# Altium PCB ruler.PcbDoc (part 1 of 2)
Units mm, origin at the board's own origin, x right, y up, seen from the top; angles counter-clockwise.
Board outline 304.8 x 31.75 mm, 2 copper layers (Top Layer, Bottom Layer); 31 components, 41 nets, 152 pads, 99 vias.
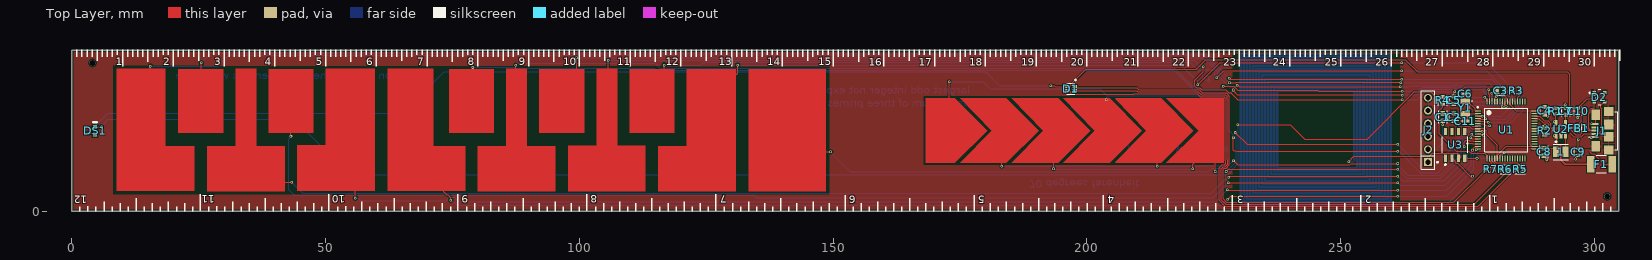
[diagram p0: Top Layer view]
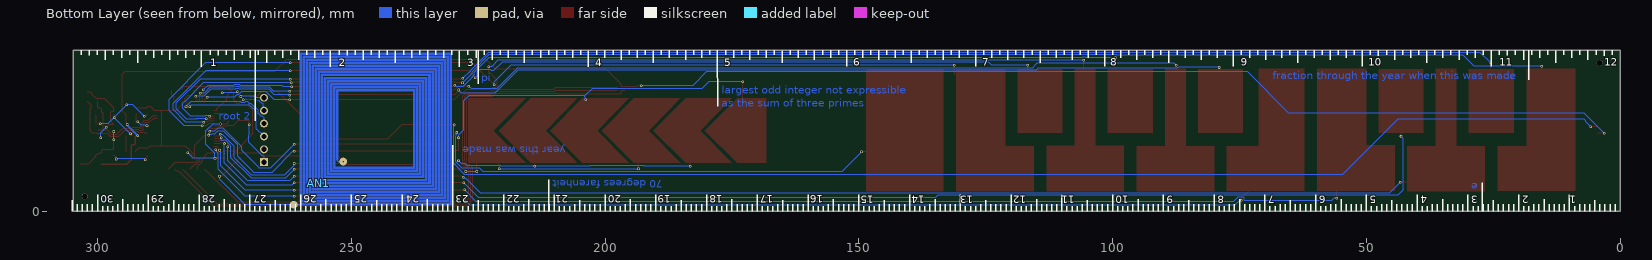
[diagram p1: Bottom Layer view, seen from below]
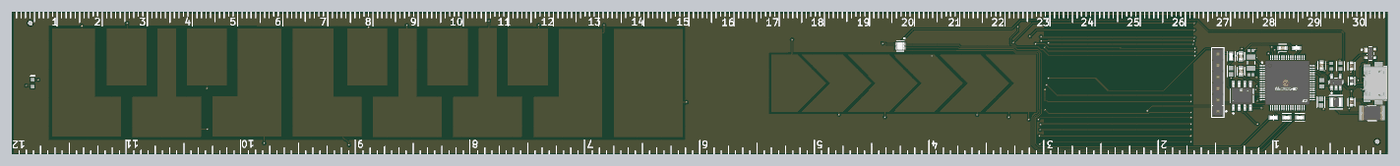
[diagram p2: 3D render of the assembled board from above, using the file's embedded part models]

## Layer stack, top to bottom
Top Solder: solder mask 0.0102, Solder Resist, Dk 3.5
Top Layer: signal copper 0.0356
Dielectric 1: dielectric 0.32, FR-4, Dk 4.8
Bottom Layer: signal copper 0.0356
Bottom Solder: solder mask 0.0102, Solder Resist, Dk 3.5

## Board outline
0,0 304.8,0 304.8,31.75 0,31.75

## Design rules (kind name [scope] priority, off if disabled: settings)
Clearance [All] p1: gap=0.254 ignorepadtopadclearanceinfootprint=FALSE except(0: Arc-Hole Track-Hole SMDPad-Hole THPad-Hole Via-Hole Fill-Hole Poly-Hole Region-Hole Text-Hole; 0.051: SMDPad-SMDPad; 0.203: Arc-Arc Arc-Track Arc-SMDPad Track-Track Track-SMDPad)
PolygonConnect [All] p1: connectstyle=Relief reliefconductorwidth=0.254 reliefentries=4 polygonreliefangle="90 Angle" airgapwidth=0.254
RoutingVias [All] p1: holewidth=0.305 width=0.508 viastyle="Through Hole" minholewidth=0.305 minwidth=0.508 maxholewidth=0.305 maxwidth=0.508
SilkToSilkClearance [All] p1: silktosilkclearance=0.127
SolderMaskExpansion [All] p1: expansion=0.102 istentingtop=TRUE
Width [All] p1: maxlimit=0.254 minlimit=0.127 preferedwidth=0.178
29 further rules are at their usual default settings.

## Components (designator, comment, footprint, x,y, rotation, side; value= is the part's Value field where it differs from the comment)
1 "LQM2HPN2R2MG0L" FP-LQM2HPN_G0-IPC_C 293.37,11.684 r180 top value=10uF
AN1 "NFC Antenna" NFC_Antenna 260.096,1.143 r180 bottom
C1 "CL10A106MP8NNNC" FP-CL10-IPC_B 270.129,18.542 r90 top
C2 "CC0603KRX7R9BB104" FP-CC0603-DA-MFG 272.288,18.542 r270 top value="100 nF"
C3 "CC0603KRX7R9BB104" FP-CC0603-DA-MFG 281.559,23.695 r180 top value="100 nF"
C4 "CC0603KRX7R9BB104" FP-CC0603-DA-MFG 290.195,19.812 r90 top value="100 nF"
C5 "CC0603KRX7R9BB104" FP-CC0603-DA-MFG 272.288,21.844 r270 top value="100 nF"
C6 "GRM1555C1E6R8CA01D" CAPC1005X55X25NL05T10 274.574,23.094 r180 top
C7 "CL10A475KP8NNNC" FP-CL10-IPC_C 294.386,19.685 r90 top
C8 "CL10A106MP8NNNC" FP-CL10-IPC_B 290.068,11.684 r270 top
C9 "GRM1885C1H472JA01D" FP-GRM188-0_1-e0_2_0_5-MFG 296.799,11.684 r270 top
C10 "GRM1885C1H472JA01D" FP-GRM188-0_1-e0_2_0_5-MFG 296.799,19.685 r270 top
C11 "GRM1555C1E6R8CA01D" CAPC1005X55X25NL05T10 274.574,17.76 r0 top
D1 "LTST-C19HE1WT" FP-LTST-C19HE1WT-MFG 196.85,24.13 r270 top
D2 "PRTR5V0U2X,215" FP-SOT143B-MFG 300.99,22.479 r0 top
DS1 "LTW-C191TS5" LTST-LTW-C191TS5_V 4.572,15.875 r90 top
F1 "MF-MSMF050-2" FP-MF-MSMF050-2-MFG 301.371,9.271 r0 top value=0.15-1Ω
FB1 "BLM18PG471SN1D" FP-BLM18-0_15-t0_8-MFG 296.799,16.383 r90 top
J1 "10118192-0002LF" 101181920002LF 301.993,15.875 r90 top
J2 "22-28-4063" FP-22-28-4063-MFG 267.208,16.002 r90 top
R1 "ERJ3EKF1913V" RESC1608X55X30LL15T15 292.354,19.685 r90 top
R2 "CRCW060342K2FKEA" RESC1609X50X30ML10T20 290.195,15.875 r90 top
R3 "ERJ-PA3J331V" FP-ERJPA3-MFG 284.607,23.695 r180 top
R4 "ERJ-3EKF2000V" FP-ERJ3EK-IPC_C 270.129,21.844 r90 top
R5 "ERJ-3EKF2000V" FP-ERJ3EK-IPC_C 285.369,8.255 r180 top
R6 "ERJ-3EKF2000V" FP-ERJ3EK-IPC_C 282.448,8.255 r0 top
R7 "ERJ-PA3J331V" FP-ERJPA3-MFG 279.527,8.255 r0 top
U1 "ATSAMD21J18A-AUT" FP-MF-IPC_C 282.6,16 r0 top
U2 "TLV62569DBVR" FP-DBV0005A-MFG 293.37,16.129 r90 top value=10uF
U3 "M24SR64-YMN6T/2" FP-SO-A-MFG 272.542,13.081 r90 top
Y1 "CM315D32768DZFT" CMHT-CM315D-2_V 274.574,20.427 r270 top

## Footprints (in the part's own frame and the unit in brackets; to place one, negate y for a bottom-side part, rotate by r counter-clockwise, add the part's x,y. Pads: shape width x height; smd on the part's side, far side on the other; paste and mask are expansions set on the pad)
101181920002LF [mm]
  rect 0.4x1.35 smd: 1(-1.3,1.875) 2(-0.65,1.875) 3(0,1.875) 4(0.65,1.875) 5(1.3,1.875)
  rect 2.1x1.6 smd: MP1(-3.1,1.75) MP2(3.1,1.75)
  rect 1.8x1.9 smd: MP3(-3.8,-0.8) MP6(3.8,-0.8)
  rect 1.9x1.9 smd: MP4(-1.2,-0.8) MP5(1.2,-0.8)
  silkscreen extent -3.75,-2.55 3.75,3.08, body extent -3.96,-2.55 3.96,2.55, height 2.77
CAPC1005X55X25NL05T10 [mm] "Chip Capacitor, 2-Leads, Body 1.00x0.50mm, IPC Medium Density"
  rect 0.66x0.62 smd: 1(-0.44,0) 2(0.44,0)
  body extent -0.53,-0.28 0.53,0.27, height 0.55
CMHT-CM315D-2_V [mm] "SMD, 2-Leads, Body 1.60x3.30mm, Pitch 2.50mm"
  rect 1.1x1.9 smd: 1(-1.25,0) 2(1.25,0)
  silkscreen extent -1.3,-0.8 0.3,1.32, body extent -1.65,-0.8 1.65,0.8, height 0.9
FP-22-28-4063-MFG [mm]
  rect 1.57x1.57 hole 1.02 paste-1000 mask+0: 1(-6.35,0)
  round 1.57 hole 1.02 paste-1000 mask+0: 2(-3.81,0) 3(-1.27,0) 4(1.27,0) 5(3.81,0) 6(6.35,0)
  silkscreen extent -7.75,-1.97 7.75,1.37, body extent -7.85,-1.47 7.85,1.47, height 0.25
FP-BLM18-0_15-t0_8-MFG [mm]
  rect 0.65x0.7 smd paste+0 mask+0: 1(-0.675,0) 2(0.675,0)
  silkscreen extent -0.87,-0.72 0.87,0.72, body extent -1.1,-0.58 1.1,0.58, height 0.25
FP-CC0603-DA-MFG [mm]
  rect 0.8x0.9 smd paste+0 mask+0: 1(-0.75,0) 2(0.75,0)
  silkscreen extent -0.85,-0.85 0.85,0.85, body extent -1.35,-0.75 1.35,0.75, height 0.25
FP-CL10-IPC_B [mm]
  rect 0.958x0.912 smd paste+0 mask+0: 1(-0.727,0) 2(0.727,0)
  silkscreen extent -1.21,-0.86 1.21,0.86, body extent -1.46,-0.71 1.46,0.71, height 0.25
FP-CL10-IPC_C [mm]
  rect 0.758x0.812 smd paste+0 mask+0: 1(-0.627,0) 2(0.627,0)
  silkscreen extent -1.01,-0.85 1.01,0.85, body extent -1.11,-0.55 1.11,0.55, height 0.25
FP-DBV0005A-MFG [mm]
  rrect17% 1.1x0.6 smd paste+0 mask+0: 1(-1.3,0.95) 2(-1.3,0) 3(-1.3,-0.95) 4(1.3,-0.95) 5(1.3,0.95)
  silkscreen extent -2.57,-1.53 0.87,1.53, body extent -1.95,-1.78 1.95,1.78, height 0.25
FP-ERJ3EK-IPC_C [mm]
  rect 0.757x0.862 smd paste+0 mask+0: 1(-0.651,0) 2(0.651,0)
  silkscreen extent -1.03,-0.87 1.03,0.87, body extent -1.13,-0.58 1.13,0.58, height 0.25
FP-ERJPA3-MFG [mm]
  rect 0.65x0.9 smd paste+0 mask+0: 1(-0.725,0) 2(0.725,0)
  silkscreen extent -0.03,-0.48 0.03,0.48, body extent -1.15,-0.58 1.15,0.58, height 0.25
FP-GRM188-0_1-e0_2_0_5-MFG [mm]
  rect 0.65x0.7 smd paste+0 mask+0: 1(-0.675,0) 2(0.675,0)
  silkscreen extent -0.85,-0.75 0.85,0.75, body extent -1.1,-0.55 1.1,0.55, height 0.25
FP-LQM2HPN_G0-IPC_C [mm]
  rect 1.155x2.106 smd paste+0 mask+0: 1(-0.926,0) 2(0.926,0)
  silkscreen extent -1.5,-1.5 1.5,1.5, body extent -1.6,-1.2 1.6,1.2, height 0.25
FP-LTST-C19HE1WT-MFG [mm]
  rect 0.65x0.85 smd paste+0 mask+0: 1(-0.425,0.725) 2(0.425,0.725) 3(0.425,-0.725) 4(-0.425,-0.725)
  silkscreen extent -1.85,-0.8 1.12,1.03, body extent -0.95,-1.25 0.95,1.25, height 0.25
FP-MF-IPC_C [mm]
  rect 1.188x0.212 smd paste+0 mask+0: 1(-5.591,3.75)
  rrect100% 1.188x0.212 smd paste+0 mask+0: 2(-5.591,3.25) 3(-5.591,2.75) 4(-5.591,2.25) 5(-5.591,1.75) 6(-5.591,1.25) 7(-5.591,0.75) 8(-5.591,0.25) 9(-5.591,-0.25) 10(-5.591,-0.75) 11(-5.591,-1.25) 12(-5.591,-1.75) 13(-5.591,-2.25) 14(-5.591,-2.75) 15(-5.591,-3.25) 16(-5.591,-3.75) 33(5.591,-3.75) 34(5.591,-3.25) 35(5.591,-2.75) 36(5.591,-2.25) 37(5.591,-1.75) 38(5.591,-1.25) 39(5.591,-0.75) 40(5.591,-0.25) 41(5.591,0.25) 42(5.591,0.75) 43(5.591,1.25) 44(5.591,1.75) 45(5.591,2.25) 46(5.591,2.75) 47(5.591,3.25) 48(5.591,3.75)
  rrect100% 0.212x1.188 smd paste+0 mask+0: 17(-3.75,-5.591) 18(-3.25,-5.591) 19(-2.75,-5.591) 20(-2.25,-5.591) 21(-1.75,-5.591) 22(-1.25,-5.591) 23(-0.75,-5.591) 24(-0.25,-5.591) 25(0.25,-5.591) 26(0.75,-5.591) 27(1.25,-5.591) 28(1.75,-5.591) 29(2.25,-5.591) 30(2.75,-5.591) 31(3.25,-5.591) 32(3.75,-5.591) 49(3.75,5.591) 50(3.25,5.591) 51(2.75,5.591) 52(2.25,5.591) 53(1.75,5.591) 54(1.25,5.591) 55(0.75,5.591) 56(0.25,5.591) 57(-0.25,5.591) 58(-0.75,5.591) 59(-1.25,5.591) 60(-1.75,5.591) 61(-2.25,5.591) 62(-2.75,5.591) 63(-3.25,5.591) 64(-3.75,5.591)
  silkscreen extent -5.72,-4.25 4.25,4.58, body extent -6.29,-6.29 6.29,6.29, height 0.25
FP-MF-MSMF050-2-MFG [mm]
  rect 1.5x3.2 smd paste+0 mask+0: 1(-2.1,0) 2(2.1,0)
  silkscreen extent -0.97,-1.71 0.97,1.71, body extent -2.95,-1.81 2.95,1.81, height 0.25
FP-SO-A-MFG [mm]
  rect 1.4x0.6 smd paste+0 mask+0: 1(-2.65,1.905) 2(-2.65,0.635) 3(-2.65,-0.635) 4(-2.65,-1.905) 5(2.65,-1.905) 6(2.65,-0.635) 7(2.65,0.635) 8(2.65,1.905)
  silkscreen extent -4.02,-2.5 1.58,2.5, body extent -3.45,-2.6 3.45,2.6, height 0.25
FP-SOT143B-MFG [mm]
  rect 0.7x1 smd paste-1000 mask+0: 1(-1,0.75)
  rect 0.7x0.6 smd paste-1000 mask+0: 2(-1,-0.95) 3(1,-0.95) 4(1,0.95)
  silkscreen extent -2.02,-1.5 0.7,1.5, body extent -1.5,-1.63 1.5,1.63, height 0.25
LTST-LTW-C191TS5_V [mm] "SMD, 2-Leads, Body 1.6x0.8mm"
  rect 0.8x0.8 smd: 1(-0.75,0) 2(0.75,0)
  silkscreen extent 1.65,-0.4 1.65,0.4, body extent -0.8,-0.4 0.8,0.4, height 0.65
NFC_Antenna [mil] "L=5.51 uH, tuned for 13.56 MHz"
  round 60 smd mask+4: AC0(335,340) AC1(-49.09,5.91)
  Top Layer region: 0,0 0,11.81 1165.35,11.81 1165.35,1169.29 11.81,1169.29 11.81,35.43 1141.73,35.43 1141.73,1145.67 35.43,1145.67 35.43,59.06 1118.11,59.06 1118.11,1122.05 59.06,1122.05 59.06,82.68 1094.49,82.68 1094.49,1098.43 82.68,1098.43 82.68,106.3 1070.87,106.3 1070.87,1074.8 106.3,1074.8 106.3,129.92 1047.24,129.92 1047.24,1051.18 129.92,1051.18 129.92,153.54 1023.62,153.54 1023.62,1027.56 153.54,1027.56 153.54,177.17 1000,177.17 1000,1003.94 177.17,1003.94 177.17,200.79 976.38,200.79 976.38,980.31 200.79,980.32 200.79,224.41 952.76,224.41 952.76,956.69 224.41,956.69 224.41,248.03 929.13,248.03 929.13,933.07 248.03,933.07 248.03,271.65 905.51,271.65 905.51,909.45 271.65,909.45 271.65,295.28 881.89,295.28 881.89,885.83 295.28,885.83 295.28,354.33 283.46,354.33 283.46,897.64 893.7,897.64 893.7,283.46 259.84,283.46 259.84,921.26 917.32,921.26 917.32,259.84 236.22,259.84 236.22,944.88 940.94,944.88 940.94,236.22 212.6,236.22 212.6,968.5 964.57,968.5 964.57,212.6 188.98,212.6 188.98,992.13 988.19,992.13 988.19,188.98 165.35,188.98 165.35,1015.75 1011.81,1015.75 1011.81,165.35 141.73,165.35 141.73,1039.37 1035.43,1039.37 1035.43,141.73 118.11,141.73 118.11,1062.99 1059.06,1062.99 1059.06,118.11 94.49,118.11 94.49,1086.61 1082.68,1086.61 1082.68,94.49 70.87,94.49 70.87,1110.24 1106.3,1110.24 1106.3,70.87 47.24,70.87 47.24,1133.86 1129.92,1133.86 1129.92,47.24 23.62,47.24 23.62,1157.48 1153.54,1157.48 1153.54,23.62 0,23.62 0,1181.1 1177.17,1181.1 1177.17,0
  Top Layer lines w0.5: 1177.17,0 0,0 0,11.81 1165.35,11.81 1165.35,1169.29 11.81,1169.29 11.81,35.43 1141.73,35.43 1141.73,1145.67 35.43,1145.67 35.43,59.06 1118.11,59.06 1118.11,1122.05 59.06,1122.05 59.06,82.68 1094.49,82.68 1094.49,1098.43 82.68,1098.43 82.68,106.3 1070.87,106.3 1070.87,1074.8 106.3,1074.8 106.3,129.92 1047.24,129.92 1047.24,1051.18 129.92,1051.18 129.92,153.54 1023.62,153.54 1023.62,1027.56 153.54,1027.56 153.54,177.17 1000,177.17 1000,1003.94 177.17,1003.94 177.17,200.79 976.38,200.79 976.38,980.31 200.79,980.32 200.79,224.41 952.76,224.41 952.76,956.69 224.41,956.69 224.41,248.03 929.13,248.03 929.13,933.07 248.03,933.07 248.03,271.65 905.51,271.65 905.51,909.45 271.65,909.45 271.65,295.28 881.89,295.28 881.89,885.83 295.28,885.83 295.28,354.33 289.37,354.33 283.46,354.33 283.46,897.64 893.7,897.64 893.7,283.46 259.84,283.46 259.84,921.26 917.32,921.26 917.32,259.84 236.22,259.84 236.22,944.88 940.94,944.88 940.94,236.22 212.6,236.22 212.6,968.5 964.57,968.5 964.57,212.6 188.98,212.6 188.98,992.13 988.19,992.13 988.19,188.98 165.35,188.98 165.35,1015.75 1011.81,1015.75 1011.81,165.35 141.73,165.35 141.73,1039.37 1035.43,1039.37 1035.43,141.73 118.11,141.73 118.11,1062.99 1059.06,1062.99 1059.06,118.11 94.49,118.11 94.49,1086.61 1082.68,1086.61 1082.68,94.49 70.87,94.49 70.87,1110.24 1106.3,1110.24 1106.3,70.87 47.24,70.87 47.24,1133.86 1129.92,1133.86 1129.92,47.24 23.62,47.24 23.62,1157.48 1153.54,1157.48 1153.54,23.62 0,23.62 0,1181.1 1177.17,1181.1 1177.17,0
  Top Layer lines w11.81: 335,340 295,340 289.37,345.63 289.37,354.33 ; 0,5.91 -49.09,5.91
RESC1608X55X30LL15T15 [mm] "Chip Resistor, 2-Leads, Body 1.60x0.80mm, IPC High Density"
  rect 0.7x0.85 smd: 1(-0.625,0) 2(0.625,0)
  body extent -0.87,-0.48 0.87,0.48, height 0.55
RESC1609X50X30ML10T20 [mm] "Chip Resistor, 2-Leads, Body 1.55x0.85mm, IPC Low Density"
  rect 0.9x1.05 smd: 1(-0.675,0) 2(0.675,0)
  body extent -0.82,-0.48 0.82,0.48, height 0.5

## Part data
1: library part CMP-1662-00028-2, "Multilayer Type Inductor for Power Lines, 1008 (2520), 2.2μH, 20%, 0.1Ω, 1.3A", Capacitor Type=Ceramic, Case Code (Imperial)=1008, Case Code (Metric)=2520, Current Rating=1.3A, DC Resistance (DCR)=100mR, Inductance=2.2uH, Inductance Tolerance=20%, LCSC Part Number=C86092, Manufacturer=Samsung, Manufacturer Part Number=CL10A106KP8NNNC, Max Operating Temperature=125°C, Min Operating Temperature=-55°C, Package Quantity=3000, Package Shape=Rectangular, Package Style=SMTMeter, Rated DC Voltage (URdc)=10V, Self Resonant Frequency=40MHz, Temperature Characteristics Code=X5R, Test Frequency=1MHz, Tolerance  (fill in as +-)=10%, Case/Package=1008, Category="Ceramic Capacitors", ComponentLink1Description=https://datasheet.ciiva.com:443/pdfs/VipMasterIC/IC/SEMS/SEMS-S-A0008384515/SEMS-S-A0008873229-1.pdf?src-supplier=IHS+Markit, ComponentLink1URL=https://datasheet.ciiva.com:443/pdfs/VipMasterIC/IC/SEMS/SEMS-S-A0008384515/SEMS-S-A0008873229-1.pdf?src-supplier=IHS+Markit, ComponentLink2Description=https://datasheet.ciiva.com/26877/getdatasheetpartid-359551-26877881.pdf?src-supplier=Verical, ComponentLink2URL=https://datasheet.ciiva.com/26877/getdatasheetpartid-359551-26877881.pdf?src-supplier=Verical, ComponentLink3Description=https://datasheet.ciiva.com/29198/457369-da-01-en-vs-kondensator-0603-29198790.pdf?src-supplier=Conrad, ComponentLink3URL=https://datasheet.ciiva.com/29198/457369-da-01-en-vs-kondensator-0603-29198790.pdf?src-supplier=Conrad, ComponentLink4Description=https://datasheet.ciiva.com/16200/cl05b104kq5nnnc-16200766.pdf?src-supplier=Future+Electronics, ComponentLink4URL=https://datasheet.ciiva.com/16200/cl05b104kq5nnnc-16200766.pdf?src-supplier=Future+Electronics, Core Material=Ferrite, DC Current=1.3A, Depth=2.2mm, Dielectric Material=Ceramic, Height=1.2mm, Height - Seated (Max)=0.039inch, JESD-609 Code=e3, Lead Free="Lead Free", Length=2.5mm, Max DC Current=1.3A, Military Standard=Not, Mount="Surface Mount", Mounting Technology="Surface Mount", Multilayer=Yes, Packaging="Tape and Reel", Pins=2, Pricing="4000=0.0309, 8000=0.0267, 12000=0.0253, 28000=0.0232, 100000=0.0181, 200000=0.017, 400000=0.0164 (USD)", Radiation Hardening=No, REACH SVHC="No SVHC", Reach SVHC Compliant=Yes, RoHS=Yes, RoHS Compliant=Yes, Series=LQM2HP_G0, Shielding=Shielded, Stock=1924000, Supplier="Arrow Electronics", Supplier Part Number=CL10A106KP8NNNC, Terminal Finish=Nickel, Termination=SMD/SMT, Tolerance=20%, Tolerance (fill in as +-)=10%, Width=2mm
AN1: library part NFC_Antenna, "L=5.51 uH, tuned for 13.56 MHz", L="5.51 uH"
C1 C8: library part CMP-13271-003248-1, "Cap Ceramic 10uF 10V X5R ±20% Pad SMD 0603 +85°C T/R", Capacitance=10uF, Case Code (Imperial)=0603, Case Code (Metric)=1608, Dielectric=X5R, LCSC Part Number=C85713, Max Operating Temperature=85°C, Min Operating Temperature=-55°C, Package Quantity=1, Tolerance=20%, Voltage Rating=10V, Case/Package=0603, Contact Plating=Tin, Depth=0.8mm, Height=0.8mm, Lead Free="Lead Free", Length=1.6mm, Mount="Surface Mount", Packaging="Tape and Reel", Radiation Hardening=No, Thickness=0.035inch, Voltage Rating (DC)=10V, Width=0.031inch
C2 C3 C4 C5: library part CMP-2100-03601-2, "CAP CER 0.1UF 50V X7R 0603", Capacitance="100 nF", LCSC Part Number=C14663, Manufacturer=YAGEO, Package=CC0603-DA, Temperature="-55°C to +125°C", Temperature Characteristic=X7R, Temperature Coefficient=15%, Temperature Range High=+125°C, Temperature Range Low=-55°C, Tolerance=0.1, Voltage="50 V", Automotive=No, Category=Cap, ComponentLink2Description=Datasheet, ComponentLink2URL=http://www.yageo.com/documents/recent/UPY-GPHC_X7R_6.3V-to-50V_18.pdf, Device Class L1="Passive Components", Device Class L2=Capacitors, Device Class L3="Ceramic Capacitors", Digikey Description="CAP CER 0.1UF 50V X7R 0603", Footprint Url=http://www.yageo.com/exep/pages/download/literatures/UPY-C_GEN_24.pdf, Height=0.9mm, Lead Free=Yes, Manufacturer Part Number=CC0603KRX7R9BB104, Material=Ceramic, Mouser Description="Multilayer Ceramic Capacitor, CC Series, 0.1 - F, - 10%, X7R, 50 V, 0603 [1608 Metric]", Octopart=https://octopart.com/cc0603krx7r9bb104-yageo-42244635, RoHS=TRUE, Voltage Rating="50 V"
C6 C11: library part CMP-2008-04219-1, LCSC Part Number=C3877782, Manufacturer=Murata, Part Number=GRM1555C1E6R8CA01D
C7: library part CMP-13271-003017-1, "Cap Ceramic 4.7uF 10V X5R ±10% Pad SMD 0603 +85°C T/R", Capacitance=4.7uF, Case Code (Imperial)=0603, Case Code (Metric)=1608, Dielectric=X5R, LCSC Part Number=C1705, Max Operating Temperature=85°C, Min Operating Temperature=-55°C, Package Quantity=1, Tolerance=10%, Voltage Rating=10V, Case/Package=0603, Contact Plating=Tin, Depth=0.8mm, Height=0.8mm, Length=1.6mm, Mount="Surface Mount", Packaging="Tape and Reel", Radiation Hardening=No, Thickness=0.035inch, Width=0.031inch
C9 C10: library part CMP-2006-02564-2, "Chip Multilayer Ceramic Capacitors for General Purpose, 0603, 4700pF, C0G, 30ppm/°C, 5%, 50V", Capacitance=4.7nF, Case Code (Imperial)=0603, Case Code (Metric)=1608, Dielectric=C0G, LCSC Part Number=C85980, Max Operating Temperature=125°C, Min Operating Temperature=-55°C, Package Quantity=4000, Tolerance=5%, Voltage Rating=50V, Case/Package=0603, Height=0.8mm, Lead Free="Lead Free", Length=1.6mm, Material=Ceramic, Mount="Surface Mount", Packaging="Tape and Reel", REACH SVHC="No SVHC", Termination=SMD/SMT, Thickness=0.035inch, Voltage Rating (DC)=50V, Width=0.8mm
D1: library part CMP-2000-05201-2, "LED RGB DIFFUSED CHIP SMD", Case Code (Imperial)=0606, Case Code (Metric)=1616, Color=Blue, Forward Current=20mA, Forward Voltage=3.35V, LCSC Part Number=C458749, Lens Color=White, Max Operating Temperature=80°C, Min Operating Temperature=-20°C, Package Quantity=3000, Reverse Voltage=5V, Case/Package=0606, Depth=1.6mm, Dominant Wavelength=470nm, Height=0.35mm, Lead Free="Lead Free", Length=1.6mm, Lens Style=Diffused, Lens Transparency=Diffused, Luminous Intensity=180mcd, Mount="Surface Mount", Number of Elements=3, Number of LEDs=3, Number of Pins=4, Packaging="Tape and Reel", Radiation Hardening=No, Test Current=20mA, Viewing Angle=130°, Width=1.6mm
D2: library part CMP-14436-000007-1, "TVS DIODE 5.5V SOT143B", LCSC Part Number=C12333
DS1: library part CMP-1674-00013-1, "LED Uni-Color White, 70 mW, 20 mA, -20 to 80 degC, 2-Pin SMD, RoHS, Tape and Reel", Case Code (Imperial)=0603, Case Code (Metric)=1608, LCSC Part Number=C125123, Max Operating Temperature="155 degC", Min Operating Temperature="-55 degC", Package Quantity=5000, Power Rating="100 mW", Resistance="12 Ohm", Tolerance=1%, Voltage Rating="50 V", Case\Package=0603, ComponentLink1Description="Manufacturer URL", ComponentLink1URL=http://www.us.liteon.com/, ComponentLink2Description=Datasheet, ComponentLink2URL=http://optoelectronics.liteon.com/upload/download/DS22-2004-201/S_110_LTW-C191TS5.pdf, DatasheetVersion="Rev. B, 06/2010", Height="0.45 mm", Length="1.6 mm", Mount="Surface Mount", PackageDescription="2-Pin Surface Mount Device, Body 1.6 x 0.8 mm", PackageReference=LTW-C191TS5, Packaging="Tape and Reel", Pins=2, REACH SVHC="No SVHC", RoHSCompliant=true, Voltage Rating (DC)="50 V", Width="0.8 mm"
F1: library part CMP-2100-03653-2, "PTC RESET FUSE 15V 500MA 1812", Ambient Temperature Range High=+85°C, Ambient Temperature Range Low=-40°C, Current Rating=100A, Hold Current=0.5A, LCSC Part Number=C17313, Manufacturer=Bourns, Package=1812, Resistance=0.15-1Ω, Temperature="-40°C to +85°C", Trip Current=1A, Voltage Rating=15V, Automotive=Yes, Automotive Grade="Grade 3", Category=Fuse, ComponentLink2Description=Datasheet, ComponentLink2URL=http://www.bourns.com/docs/Product-Datasheets/mfmsmf.pdf, Device Class L1="Circuit Protection", Device Class L2="PTC Resettable Fuses", Device Class L3=unset, Digikey Description="PTC RESET FUSE 15V 500MA 1812", Height=0.85mm, Lead Free=Yes, Manufacturer Part Number=MF-MSMF050-2, Mouser Description="PTC Resettable Fuse 0.5A(hold) 1A(trip) 15V 100A 0.8W 0.15s 0.15Ohm SMD Solder Pad 1812 T/R", Octopart=https://octopart.com/mf-msmf050-2-bourns-28047, RoHS=TRUE, Temperature Range High=+85°C, Temperature Range Low=-40°C, Trip Time=0.15s
FB1: library part CMP-0686-00587-3, "Chip Ferrite Bead, 0603, 470Ω @ 100MHz, 0.2Ω, 25%, 1A", Case Code (Imperial)=0603, Case Code (Metric)=1608, Current Rating=1A, DC Resistance (DCR)=200mR, LCSC Part Number=C97853, Max Operating Temperature=125°C, Min Operating Temperature=-55°C, Package Quantity=1, Test Frequency=100MHz, Tolerance=25%, Case/Package=0603, Core Material=Ferrite, DC Current=1A, DC Resistance-Max=200mR, Depth=0.8mm, Height=0.8mm, Impedance=470R, Lead Free="Lead Free", Length=1.6mm, Material=Steel, Max Current Rating=1A, Max DC Current=1A, Military Standard=Not, Number of Circuits=1, Number of Lines=1, Number of Pins=2, Packaging="Tape and Reel", Radiation Hardening=No, REACH SVHC="No SVHC", Resistance=200mR, RoHS Compliant=Yes, Series=BLM18P, Termination=SMD/SMT, Width=0.8mm
J1: "Connector", LCSC Part Number=C2972784, Manufacturer_Name="Amphenol Communications Solutions", Arrow Part Number=10118192-0002LF, Arrow Price/Stock=https://www.arrow.com/en/products/10118192-0002lf/amphenol-fci?region=nac, Datasheet Link=https://cdn.amphenol-cs.com/media/wysiwyg/files/drawing/10118192.pdf, Height=3.08mm, Manufacturer_Part_Number=10118192-0002LF
J2: library part CMP-04776-000885-1, "CONN HEADER VERT 6POS 2.54MM", Color=Black, Contact Resistance=20mR, Current Rating=4A, Flammability Rating="UL94 V-0", Max Operating Temperature=75°C, Max Voltage Rating (AC)=250V, Max Voltage Rating (DC)=250.25kV, Min Operating Temperature=0°C, Package Quantity=1, Connector Type="Male Pin", Contact Material=Brass, Contact Mating Length=0.24inch, Contact Plating=Gold, Contact Type="Male Pin", Depth=2.49mm, Gender=Male, Glow Wire Compliant=Non-compliant, Housing Color=Black, Housing Material=Thermoplastic, Lead Free="Lead Free", Mount="Through Hole", Number of Circuits=6, Number of Contacts=6, Number of Positions=6, Number of Rows=1, Orientation=Straight, Packaging=Bulk, Pitch=2.54mm, Radiation Hardening=No, RoHS Compliant=Yes, Series="KK® 42375", Termination=Solder, Voltage Rating=250V, Voltage Rating (DC)=250V
R1: library part CMP-2000-00311-1, LCSC Part Number=C403050, Manufacturer=Panasonic, Part Number=ERJ-3EKF1913V
R2: library part CMP-2000-03344-1, LCSC Part Number=C844563, Manufacturer="Vishay Dale", Part Number=CRCW060342K2FKEA
R3 R7: library part CMP-05422-000096-1, "RES SMD 330 OHM 5% 1/4W 0603", Case Code (Imperial)=0603, Case Code (Metric)=1608, LCSC Part Number=C441887, Max Operating Temperature=155°C, Max Power Dissipation=250mW, Min Operating Temperature=-55°C, Resistance=330R, Resistor Type="Thick Film", Temperature Coefficient=200ppm/°C, Tolerance=5%, Case/Package=0603, Features="Automotive AEC-Q200", Height=0.018inch, Length=0.063inch, Number of Terminations=2, Packaging="Cut Tape", Width=0.031inch
R4 R5 R6: library part CMP-2000-00316-2, "RES SMD 200 OHM 1% 1/10W 0603", Case Code (Imperial)=0603, Case Code (Metric)=1608, LCSC Part Number=C403056, Max Operating Temperature=155°C, Max Power Dissipation=100mW, Min Operating Temperature=-55°C, Package Quantity=1, Resistance=200R, Resistance Tolerance=1%, Resistor Type="Thick Film", Temperature Coefficient=100ppm/°C, Voltage Rating=75V, Voltage Rating (DC)=50V, Case/Package=0603, Construction=Rectangular, Contact Plating=Tin, Depth=0.8mm, Features="Automotive AEC-Q200", Height=0.022inch, Lead Free="Lead Free", Length=1.6mm, Military Standard=Not, Mount="Surface Mount", Number of Terminations=2, Packaging="Tape and Reel", Power Rating=100mW, Radiation Hardening=No, REACH SVHC="No SVHC", RoHS Compliant=Yes, Series=ERJ, Technology="THICK FILM", Termination=SMD/SMT, Tolerance=1%, Width=0.031inch, Working Voltage=75V
U1: library part CMP-06276-000070-1, "IC MCU 32BIT 256KB FLASH 64TQFP", Case/Package=TQFP, Frequency=48MHz, LCSC Part Number=C515529, Max Operating Temperature=85°C, Min Operating Temperature=-40°C, Core Architecture=ARM, Interface=I2C, Memory Size=256KB, Memory Type=FLASH, Number of I/Os=52, Oscillator Type=Internal, Packaging="Tape and Reel", Peripherals="Brown-out Detect/Reset"
U2: library part CMP-04918-000387-1, "IC REG BUCK ADJ 2A SOT23-5", Capacitor Type=Ceramic, Case/Package=SOT-23-5, LCSC Part Number=C141836, Manufacturer=Samsung, Manufacturer Part Number=CL10A106KP8NNNC, Max Input Voltage=5.5V, Max Operating Temperature=125°C, Min Input Voltage=2.5V, Min Operating Temperature=-40°C, Min Output Voltage=600mV, Output Current=2A, Package Shape=Rectangular, Package Style=SMTMeter, Rated DC Voltage (URdc)=10V, Switching Frequency=1.5MHz, Temperature Characteristics Code=X5R, Tolerance  (fill in as +-)=10%, Category="Ceramic Capacitors", ComponentLink1Description=https://datasheet.ciiva.com:443/pdfs/VipMasterIC/IC/SEMS/SEMS-S-A0008384515/SEMS-S-A0008873229-1.pdf?src-supplier=IHS+Markit, ComponentLink1URL=https://datasheet.ciiva.com:443/pdfs/VipMasterIC/IC/SEMS/SEMS-S-A0008384515/SEMS-S-A0008873229-1.pdf?src-supplier=IHS+Markit, ComponentLink2Description=https://datasheet.ciiva.com/26877/getdatasheetpartid-359551-26877881.pdf?src-supplier=Verical, ComponentLink2URL=https://datasheet.ciiva.com/26877/getdatasheetpartid-359551-26877881.pdf?src-supplier=Verical, ComponentLink3Description=https://datasheet.ciiva.com/29198/457369-da-01-en-vs-kondensator-0603-29198790.pdf?src-supplier=Conrad, ComponentLink3URL=https://datasheet.ciiva.com/29198/457369-da-01-en-vs-kondensator-0603-29198790.pdf?src-supplier=Conrad, ComponentLink4Description=https://datasheet.ciiva.com/16200/cl05b104kq5nnnc-16200766.pdf?src-supplier=Future+Electronics, ComponentLink4URL=https://datasheet.ciiva.com/16200/cl05b104kq5nnnc-16200766.pdf?src-supplier=Future+Electronics, Dielectric Material=Ceramic, Height=0.8mm, JESD-609 Code=e3, Length=1.6mm, Max Output Voltage=5.5V, Mount="Surface Mount", Mounting Technology="Surface Mount", Multilayer=Yes, Output Configuration=Positive, Output Type=Adjustable, Packaging="Cut Tape", Pins=2, Pricing="4000=0.0309, 8000=0.0267, 12000=0.0253, 28000=0.0232, 100000=0.0181, 200000=0.017, 400000=0.0164 (USD)", Reach SVHC Compliant=Yes, RoHS=Yes, RoHS Compliant=Yes, Stock=1924000, Supplier="Arrow Electronics", Supplier Part Number=CL10A106KP8NNNC, Synchronous Rectifier=Yes, Terminal Finish=Nickel, Termination=Wraparound, Tolerance (fill in as +-)=10%, Width=0.8mm
U3: library part CMP-12156-000003-1, "IC RFID TRANSP 13.56MHZ 8SO", Case/Package=SO, Frequency=13.56MHz, LCSC Part Number=C222221, Max Frequency=13.567MHz, Max Operating Temperature=85°C, Max Supply Voltage=5.5V, Min Frequency=13.553MHz, Min Operating Temperature=-40°C, Min Supply Voltage=2.7V, Operating Frequency="13.56 MHz", Package Quantity=2500, Supplier Part Number=511-M24LR04E-RMN6T/2, Access Time=900ns, Access Time-Max=900ns, Height=1.5mm, Interface=I2C, Lead Free="Lead Free", Length=5mm, Memory Size=64Kb, Mount="Surface Mount", Number of Pins=8, Packaging="Tape and Reel", Reach SVHC Compliant=Yes, RoHS Compliant=Yes, Series=-, Supplier=Mouser, Type="Integrated Circuit (IC)", Weight=0.01787oz, Width=4mm
Y1: library part CMP-2000-05089-1, "Turning Fork Crystal Unit, 32.768 KHz, -40 to 85 degC, 2-Pin SMD, RoHS, Tape and Reel", LCSC Part Number=C182057, Manufacturer="Citizen Micro HumanTech", Package Description="2-Pin Surface Mount Device, Body 1.6 x 3.3 mm, Pitch 2.5 mm", Package Reference=CM315D-2, Package Version="Rev. 1.4, 09/2012", Datasheet URL=http://cfm.citizen.co.jp/english/product/pdf/CM315D.pdf, Datasheet Version="Rev. 1.4, 09/2012", Manufacturer URL=http://www.citizen-systems.com/us/start, Package URL=http://cfm.citizen.co.jp/english/product/pdf/CM315D.pdf

## Free pads (board coordinates)
  round 1.152 hole 1.152 unplated paste+1.152 mask+0.148: 2(4.064,29.21) 2(302.514,2.921)

## Via types
v1: diameter 0.508, hole 0.305, Top Layer to Bottom Layer, tented both sides, 99 vias

## Nets (pads, with @x,y where several pads share a name; then routed paths per layer and width w, separated by ;. In a path a pad name is that pad's centre, name@x,y a point inside that pad or via, vN(x,y) a via of type N, cw(c..) or ccw(c..) an arc to the next point about the centre after c; other vN are vias at no path point)
3V3: 1.2 C1.1 C2.2 C3.2 C4.2 C8.1 J2.1 R1.2 U1.8 U1.21 U1.34 U1.48 U1.55 U1.56 | length 60.1
  Top Layer w0.178: v1(270.129,17.018) 270.129,17.769 270.152,17.792 C2.2 272.338,17.792 273.265,16.865 274.317,16.865 274.405,16.777 275.339,16.777 275.866,16.25 277.506,16.25 277.601,16.345 278.123,16.345 278.651,15.817 278.651,15.159 280.85,12.96 U1.21@280.85,10.967 ; C3.2 280.809,23.645 281.665,22.789 282.203,22.789 282.843,22.149 282.843,21.598 U1.56 U1.55 283.35,21.094 283.452,20.992 283.452,20.938 284.64,19.75 287.902,19.75 U1.48@287.909,19.743 ; U1.21 280.857,10.415 280.857,10.967 281.071,11.181 281.071,11.22 281.527,11.676 281.566,11.676 282.64,12.75 U1.34@287.694,12.75 ; R1.2 290.447,20.31 C4.2 289.478,20.562 288.686,19.769 288.686,19.766 288.67,19.75 U1.48 288.185,19.743 U1.48@287.909,19.743 ; 1.2 292.444,11.922 291.956,12.411 C8.1 289.729,12.75 U1.34 U1.34@287.694,12.75 ; U1.34@287.694,12.75 287.592,12.852 287.538,12.852 287.305,13.085 287.305,19.415 287.633,19.743 U1.48@287.909,19.743
  Bottom Layer w0.178: J2.1@267.2,9.65 267.2,10.717 267.53,11.047 267.673,11.047 270.256,13.63 270.256,15.089 270.129,15.216 v1(270.129,17.018)
+5: C7.1 D1.4 DS1.1 F1.1 U2.1 U2.4 | length 328
  Top Layer w0.178: v1(3.175,15.367) 4.33,15.367 DS1.1 ; v1(192.913,24.727) 193.547,24.727 193.719,24.555 D1.4 196.754,24.555 196.858,24.659 196.858,25.001 199.797,27.94 221.537,27.94 223.442,29.845 262.763,29.845 265.176,27.432 294.64,27.432 295.084,26.988 295.084,19.729 294.413,19.058 C7.1 294.32,18.992 U2.4
  Top Layer w0.254: v1(292.1,14.859) 292.39,14.859 292.593,14.656 292.593,13.216 292.742,13.067 293.159,13.067 293.352,12.874 293.352,10.178 294.259,9.271 F1.1
  Bottom Layer w0.178: v1(3.175,15.367) 7.112,19.304 65.278,19.304 73.406,27.432 180.07,27.432 182.775,24.727 v1(192.913,24.727)
  Bottom Layer w0.254: v1(292.1,14.859) 294.083,16.842 294.083,17.034 v1(294.132,17.082)
D+: D2.2 J1.3 U1.46 | length 20.9
  Top Layer w0.178: U1.46 289.172,18.75 290.118,17.804 290.868,17.804 291.393,17.279 291.393,16.36 291.497,16.256 291.536,16.256 291.713,16.433 293.127,16.433 293.304,16.256 295.163,16.256 296.328,15.091 297.27,15.091 297.441,15.262 297.441,15.374 297.991,15.924 299.192,15.924 ; J1.3@299.941,15.859 299.83,15.97 299.192,15.97 298.873,16.289 298.873,19.323 298.977,19.427 299.047,19.427 299.151,19.531 299.151,20.146 299.322,20.317 299.886,20.317 299.99,20.421 D2.2
D-: D2.3 J1.2 U1.45 | length 22.1
  Top Layer w0.178: U1.45 289.061,18.25 289.888,17.423 290.71,17.423 291.012,17.121 291.012,16.098 291.235,15.875 291.694,15.875 291.871,16.052 292.969,16.052 293.146,15.875 294.752,15.875 295.917,14.71 297.428,14.71 297.943,15.225 299.925,15.225 299.941,15.209 300.068,15.336 300.969,15.336 301.437,15.804 301.437,20.146 301.244,20.339 301.244,20.833 301.94,21.529 D2.3
GND: C1.2 C2.1 C3.1 C4.1 C5.1 C6.1 C7.2 C8.2 C9.2 C10.2 C11.1 D2.1 J1.5 J1.MP1 J1.MP2 J1.MP3 J1.MP4 J1.MP5 J1.MP6 J2.6 R2.1 U1.7 U1.22 U1.33 U1.47 U1.54 U2.2 U3.4 | length 63.9
  Top Layer w0.178: J2.6@267.2,22.35 J2.6@267.585,22.35 ; C5.1 272.288,23.261 272.507,23.48 v1(272.507,23.55) ; C11.1 274.154,17.76 274.375,17.539 274.375,17.346 274.563,17.158 275.497,17.158 275.905,16.75 U1.7 ; 274.955,10.448 274.989,10.414 v1(276.86,10.414) ; C6.1 275.235,23.315 275.41,23.315 v1(275.463,23.368) ; v1@275.624,17.031 v1(275.777,17.184) ; U1.22 281.35,10.906 281.452,11.008 281.452,11.062 281.685,11.295 281.94,11.295 282.145,11.5 v1(282.234,11.5) ; C8.2 290.435,10.59 290.435,10.39 290.576,10.249 v1(290.576,10.16) ; R2.1 290.489,15.494 291.852,15.494 292.029,15.671 292.811,15.671 293.159,15.323 293.159,15.04 U2.2 293.37,15.136 v1(293.512,15.278) ; C4.1 290.506,18.751 290.659,18.751 290.741,18.669 v1(290.83,18.669) ; v1(296.291,10.287) 296.354,10.35 296.354,10.589 296.774,11.009 C9.2 ; v1(296.672,18.415) 296.672,18.883 C10.2 ; v1(299.47,17.272) 299.583,17.159 J1.5@299.941,17.159 ; J1.5@300.22,17.175 300.22,18.85 J1.MP2@300.345,18.975
  Bottom Layer w0.178: J2.6@267.2,22.35 268.857,22.35 269.113,22.606 271.763,22.606 v1(271.772,22.598) ; v1(272.507,23.55) 272.596,23.55 272.779,23.368 v1(275.463,23.368) ; v1(275.777,17.184) 275.815,17.145 277.323,17.145 278.651,15.817 278.651,13.228 276.86,11.437 v1(276.86,10.414) 281.148,10.414 v1(282.234,11.5) ; v1(290.576,10.16) 290.665,10.16 290.792,10.287 v1(296.291,10.287) ; v1(290.83,18.669) 293.106,20.945 v1(294.259,20.945) 296.731,18.474 297.987,17.217 299.415,17.217 v1(299.47,17.272) ; v1(293.512,15.278) 293.524,15.278 296.66,18.415 v1(296.672,18.415)
led_blue: R5.1 U1.20 | length 6.9
  Top Layer w0.178: U1.20 280.35,9.911 280.452,9.81 280.452,9.756 280.685,9.523 284.805,9.523 286.02,8.308 R5.1
led_green: R6.1 U1.19 | length 3.2
  Top Layer w0.178: U1.19 279.85,9.911 279.952,9.81 279.952,9.756 280.071,9.637 280.071,9.598 280.527,9.142 280.963,9.142 281.797,8.308 R6.1
led_red: R7.2 U1.18 | length 2.5
  Top Layer w0.178: U1.18 279.35,9.911 279.452,9.81 279.452,9.717 279.69,9.479 279.69,9.44 280.252,8.878 R7.2
led_white: R4.1 U1.17 | length 18.1
  Top Layer w0.178: R4.1 270.129,20.548 269.789,20.209 269.72,20.209 269.381,19.869 269.381,15.226 272.755,11.852 275.254,11.852 275.722,11.384 278.363,11.384 278.85,10.897 U1.17
Net1_1: 1.1 U2.3 | length 3.2
  Top Layer w0.178: 1.1 294.32,11.708 U2.3
NetAN1_AC0: AN1.AC0 U3.3 | length 23.4
  Top Layer w0.178: v1(251.587,9.779) 252.601,10.793 267.419,10.793 268.066,11.44 273.093,11.44 273.685,10.848 273.685,10.448
NetAN1_AC1: AN1.AC1 U3.2 | length 22.7
  Top Layer w0.178: U3.2@271.929,10.534 272.585,9.878 272.585,9.61 272.756,9.439 273.024,9.439 275.542,6.921 275.908,6.921 v1(275.971,6.858)
  Bottom Layer w0.178: AN1.AC1@261.747,1.524 261.747,1.511 261.965,1.293 270.914,1.293 275.958,6.337 275.958,6.845 v1(275.971,6.858)
NetC6_2: C6.2 U1.1 Y1.1 | length 5.1
  Top Layer w0.178: C6.2 274.154,23.094 274.375,22.873 274.375,22.68 274.574,22.481 Y1.1 274.974,21.677 276.504,20.147 276.504,19.767 276.521,19.75 U1.1
NetC9_1: C9.1 F1.2 FB1.1 | length 11.6
  Top Layer w0.178: v1(296.799,14.097) C9.1 297.035,12.123 299.027,12.123 299.151,11.999 299.151,11.604 299.457,11.298 300.007,11.298 300.313,10.992 300.313,10.837 301.879,9.271 F1.2
  Bottom Layer w0.178: v1(296.799,14.097) v1(296.799,15.708)
NetC10_1: C10.1 D2.4 FB1.2 J1.1 | length 14.7
  Top Layer w0.178: FB1.2 FB1.2@296.824,17.058 ; v1(298.276,16.521) 297.739,17.058 FB1.2@296.824,17.058 ; D2.4 301.373,23.429 300.917,22.973 300.917,22.893 300.145,22.121 298.585,22.121 296.824,20.36 C10.1 296.799,19.768 296.94,19.627 297.27,19.627 297.441,19.456 297.441,17.675 FB1.2@296.824,17.058
  Bottom Layer w0.178: v1(298.276,16.521) 299.339,15.458 v1(299.339,14.501)
NetC11_2: C11.2 U1.2 Y1.2 | length 4.1
  Top Layer w0.178: C11.2 275.014,18.737 Y1.2 276.438,19.177 276.512,19.25 U1.2
NetD1_1: D1.1 R7.1 | length 107.3
  Top Layer w0.178: D1.1 197.808,24.322 209.801,24.322 210.209,23.914 222.099,23.914 222.683,23.33 227.407,23.33 228.054,22.683 228.054,10.26 228.092,10.222 228.092,9.105 227.407,8.42 227.018,8.42 226.822,8.224 226.822,2.444 227.488,1.778 272.325,1.778 278.441,7.894 278.566,7.894 278.802,8.13 R7.1
NetD1_2: D1.2 R6.2 | length 111.5
  Top Layer w0.178: D1.2 209.84,23.705 210.012,23.533 221.941,23.533 222.525,22.949 227.249,22.949 227.673,22.525 227.673,10.102 227.711,10.064 227.711,9.263 227.249,8.801 226.86,8.801 226.441,8.382 226.441,2.286 227.33,1.397 276.294,1.397 283.099,8.202 R6.2
NetD1_3: D1.3 R5.2 | length 115.1
  Top Layer w0.178: D1.3 196.754,23.705 196.858,23.601 196.858,23.259 197.029,23.088 209.245,23.088 209.31,23.152 221.783,23.152 222.368,22.568 227.091,22.568 227.292,22.367 227.292,9.944 227.33,9.906 227.33,9.421 227.091,9.182 226.702,9.182 226.06,8.54 226.06,2.128 227.172,1.016 277.082,1.016 283.979,7.913 284.429,7.913 284.718,8.202 R5.2
NetDS1_2: DS1.2 R4.2 | length 284.9
  Top Layer w0.178: DS1.2 4.576,16.629 v1(5.814,16.629) ; v1(229.682,17) 240.11,17 242.886,14.224 255.225,14.224 264.494,23.493 267.758,23.493 268.756,22.495 R4.2
  Bottom Layer w0.178: v1(5.814,16.629) 6.801,17.616 6.801,17.854 7.046,18.1 43.876,18.1 54.75,7.226 227.666,7.226 229.853,9.413 229.853,16.739 229.682,16.911 v1(229.682,17)
NetR1_1: R1.1 R2.2 U2.5 | length 4.1
  Top Layer w0.178: R2.2 290.195,16.764 v1(290.257,16.826) ; R1.1 292.42,18.994 U2.5
  Bottom Layer w0.178: v1(290.257,16.826) 290.319,16.888 290.778,16.888 290.867,16.977 291.424,16.977 v1(292.1,17.653)
NetR3_1: R3.1 U1.52 | length 2.3
  Top Layer w0.178: U1.52 284.85,22.47 285.332,22.952 R3.1
rst: C5.2 J2.5 R3.2 | length 21.1
  Top Layer w0.178: v1(271.33,21.977) 271.355,21.977 272.238,21.094 C5.2 272.338,21.094 273.166,21.922 273.166,23.179 274.498,24.511 278.899,24.511 278.911,24.523 279.406,24.523 279.417,24.511 283.066,24.511 283.521,24.056 283.646,24.056 283.882,23.82 R3.2
  Bottom Layer w0.178: J2.5@267.2,19.81 267.398,20.008 267.398,21.084 267.398,21.131 267.503,21.235 267.655,21.302 ccw(c267.2,22.35) 268.123,21.676 268.176,21.729 270.719,22.042 270.804,22.042 v1(271.33,21.977)
swclk: J2.4 U1.57 | length 19.9
  Top Layer w0.178: U1.57 282.357,21.585 282.357,20.862 282.575,20.644 v1(282.575,20.554)
  Bottom Layer w0.178: J2.4@267.2,17.27 267.2,18.407 267.5,18.707 267.714,18.707 268.008,19.002 268.303,19.296 268.303,19.51 268.359,19.566 268.359,19.888 269.68,21.209 270.002,21.209 270.383,21.59 270.872,21.59 271.083,21.38 271.577,21.38 271.788,21.59 281.641,21.59 282.41,20.821 282.41,20.808 282.575,20.644 v1(282.575,20.554)
swio: J2.3 U1.58 | length 20.3
  Top Layer w0.178: v1(281.813,20.574) 281.813,21.057 281.85,21.094 U1.58
  Bottom Layer w0.178: J2.3@267.2,14.73 268.74,16.27 268.74,19.566 268.964,19.79 268.964,19.954 269.165,20.155 269.329,20.155 270.002,20.828 281.544,20.828 281.798,20.574 v1(281.813,20.574)
y0: U1.3 | length 282
  Top Layer w0.178: v1(15.494,28.575) 15.494,27.432 15.621,27.305 ; v1(228.092,25.273) 229.28,25.273 229.387,25.381 261.677,25.381 261.785,25.273 v1(261.874,25.273) ; U1.3 v1(277.853,18.75)
  Bottom Layer w0.178: v1(15.494,28.575) 28.784,28.575 30.943,30.734 99.105,30.734 99.194,30.823 222.907,30.823 226.207,27.522 226.207,27.158 v1(228.092,25.273) ; v1(261.874,25.273) 271.769,25.273 271.786,25.29 273.228,25.29 273.245,25.273 279.146,25.273 282.956,21.463 283.172,21.247 283.172,20.307 281.615,18.75 278.885,18.75 278.81,18.825 278.316,18.825 278.304,18.813 277.917,18.813 v1(277.853,18.75)
y1: U1.4 | length 275.3
  Top Layer w0.178: 25.527,27.432 v1(25.527,29.21) ; v1(228.006,26.203) 228.095,26.203 228.263,26.035 v1(262.001,26.035) ; U1.4 277.506,18.25 277.603,18.153 278.101,18.153 278.112,18.165 278.5,18.165 v1(278.563,18.228)
  Bottom Layer w0.178: v1(25.527,29.21) 27.559,31.242 223.026,31.242 226.588,27.68 226.588,27.621 v1(228.006,26.203) ; v1(262.001,26.035) 279.781,26.035 284.48,21.336 284.48,20.193 282.44,18.153 280.584,18.153 280.509,18.228 v1(278.563,18.228)
y2: U1.13 | length 245.5
  Top Layer w0.178: 39.829,5.946 40.059,5.715 v1(43.307,5.715) ; v1(227.918,6.685) 228.008,6.685 228.18,6.858 v1(261.239,6.858) ; v1(274.32,12.683) 274.32,13.627 274.625,13.932 275.292,13.932 275.355,13.869 275.989,13.869 276.108,13.75 U1.13
  Bottom Layer w0.178: v1(43.307,5.715) 45.466,3.556 224.536,3.556 227.361,6.381 227.525,6.381 227.829,6.685 v1(227.918,6.685) ; v1(261.239,6.858) 262.128,5.969 270.383,5.969 274.32,9.906 v1(274.32,12.683)
y3: U1.14 | length 255.4
  Top Layer w0.178: v1(43.18,14.732) 43.18,17.018 43.307,17.145 ; v1(227.835,5.576) 227.847,5.588 v1(261.239,5.588) ; v1(274.993,13.335) 275.044,13.386 275.933,13.386 276.069,13.25 U1.14
  Bottom Layer w0.178: v1(43.18,14.732) 42.71,14.262 42.71,4.257 43.792,3.175 134.429,3.175 134.938,2.667 224.926,2.667 v1(227.835,5.576) ; v1(261.239,5.588) 261.747,5.08 270.637,5.08 275.082,9.525 275.082,11.341 274.993,11.43 v1(274.993,13.335)
y4: U1.15 | length 231.3
  Top Layer w0.178: v1(55.88,2.578) 55.88,5.08 56.007,5.207 ; v1(227.685,4.187) 227.704,4.168 v1(261.221,4.168) ; v1(275.969,11.981) 276.032,12.044 276.032,12.324 276.451,12.743 277.002,12.743 U1.15
  Bottom Layer w0.178: v1(55.88,2.578) 55.931,2.527 56.401,2.527 56.896,2.032 73.975,2.032 74.079,2.136 74.079,2.69 74.183,2.794 75.355,2.794 76.244,1.905 225.403,1.905 v1(227.685,4.187) ; v1(261.221,4.168) 270.868,4.168 275.686,8.986 275.686,11.609 275.969,11.891 v1(275.969,11.981)
y5: U1.16 | length 213.9
  Top Layer w0.178: 73.279,5.969 73.279,3.81 73.838,3.251 74.054,3.251 74.613,2.692 74.613,2.26 v1(74.676,2.197) ; v1(227.767,2.375) 227.8,2.375 228.346,2.921 v1(261.239,2.921) ; v1(276.715,12.136) 276.829,12.25 U1.16
  Bottom Layer w0.178: v1(74.676,2.197) 74.765,2.197 75.088,1.874 75.215,1.874 75.946,1.143 226.568,1.143 227.767,2.342 v1(227.767,2.375) ; v1(261.239,2.921) 270.891,2.921 276.225,8.255 276.225,11.393 276.652,11.819 276.652,12.073 v1(276.715,12.136)
y6: U1.61 | length 208.5
  Top Layer w0.178: 78.867,26.924 78.994,27.051 v1(78.994,28.321) ; v1(228.854,23.876) 229.267,23.463 229.267,23.336 229.616,22.987 262.128,22.987 v1(262.128,22.86) ; U1.61 280.357,21.598 280.357,22.276 280.651,22.571 v1(280.651,22.66)
  Bottom Layer w0.178: v1(78.994,28.321) 87.078,28.321 87.256,28.143 114.732,28.143 115.062,27.813 217.17,27.813 221.742,23.241 228.219,23.241 v1(228.854,23.876) ; v1(262.128,22.86) 262.128,22.987 265.176,22.987 266.192,24.003 272.116,24.003 272.26,24.147 272.754,24.147 272.899,24.003 277.704,24.003 279.047,22.66 v1(280.651,22.66)
y7: U1.62 | length 199.1
  Top Layer w0.178: 87.376,27.432 87.503,27.559 v1(87.503,28.74) ; v1(226.822,24.638) 228.936,24.638 229.736,23.838 245.469,23.838 245.685,23.622 v1(262.128,23.622) ; v1(279.781,23.257) 279.843,23.195 279.843,21.598 U1.62
  Bottom Layer w0.178: v1(87.503,28.74) 87.891,29.128 105.41,29.128 105.417,29.121 105.911,29.121 105.918,29.128 114.935,29.128 115.869,28.194 217.328,28.194 221.392,24.13 226.314,24.13 v1(226.822,24.638) ; v1(262.128,23.622) 265.272,23.622 266.034,24.384 271.958,24.384 272.102,24.528 272.912,24.528 273.056,24.384 277.862,24.384 278.789,23.457 278.989,23.257 v1(279.781,23.257)
y8: U1.63 | length 188.6
  Top Layer w0.178: 99.314,27.432 99.441,27.559 v1(99.441,30.226) ; v1(229.635,24.784) 229.724,24.784 229.982,24.526 v1(261.725,24.526) ; v1(279.164,23.926) 279.158,23.92 279.158,23.036 279.35,22.844 U1.63
  Bottom Layer w0.178: v1(99.441,30.226) 105.328,30.226 105.417,30.315 105.911,30.315 106,30.226 222.965,30.226 225.826,27.365 225.826,26.859 226.149,26.536 226.149,26.372 228.017,24.504 229.266,24.504 229.545,24.784 v1(229.635,24.784) ; v1(261.725,24.526) 263.413,24.526 263.652,24.765 271.8,24.765 271.944,24.909 273.07,24.909 273.214,24.765 278.325,24.765 v1(279.164,23.926)
y9: U1.64 | length 185.4
  Top Layer w0.178: v1(105.664,29.718) 105.664,27.305 105.918,27.051 ; v1(222.885,28.444) 222.885,27.432 221.272,25.819 221.272,24.645 221.622,24.295 222.257,24.295 222.63,23.922 227.353,23.922 227.936,23.339 228.375,23.339 229.743,21.971 v1(262.128,21.971) ; v1(278.384,22.479) 278.85,22.013 U1.64
  Bottom Layer w0.178: v1(105.664,29.718) 118.681,29.718 118.732,29.769 221.107,29.769 222.369,28.507 222.822,28.507 v1(222.885,28.444) ; v1(262.128,21.971) 265.205,21.971 266.727,23.493 271.72,23.493 272.26,22.954 272.543,22.954 273.018,22.479 v1(278.384,22.479)
y10: U1.5 | length 185.7
  Top Layer w0.178: 116.459,27.432 116.713,27.686 v1(116.713,28.791) ; v1(225.552,26.289) 226.949,27.686 v1(262.001,27.686) ; U1.5 278.121,17.75 278.24,17.631 278.557,17.631 278.568,17.619 279.013,17.619 v1(279.076,17.556)
  Bottom Layer w0.178: v1(116.713,28.791) 123.822,28.791 124.419,29.388 220.294,29.388 221.996,27.686 222.365,27.686 222.526,27.847 224.805,27.847 225.171,27.481 225.171,26.67 v1(225.552,26.289) ; v1(262.001,27.686) 278.669,27.686 285.115,21.24 285.115,20.066 282.605,17.556 v1(279.076,17.556)
y11: U1.6 | length 178.8
  Top Layer w0.178: 128.143,27.051 128.27,26.924 129.673,26.924 129.724,26.975 131.128,26.975 131.128,27.204 131.191,27.267 v1(131.191,28.791) ; v1(221.869,24.892) 226.187,29.21 v1(262.001,29.21) ; U1.6 278.227,17.25 278.606,16.871 v1(279.41,16.871)
  Bottom Layer w0.178: v1(131.191,28.791) 218.605,28.791 221.869,25.527 v1(221.869,24.892) ; v1(262.001,29.21) 278.765,29.21 285.877,22.098 285.877,19.812 282.936,16.871 v1(279.41,16.871)
y12: U1.9 | length 147.7
  Top Layer w0.178: 146.431,11.684 v1(149.479,11.684) ; v1(229.256,15.5) 231.548,13.208 v1(261.239,13.208) ; U1.9 277.01,15.749 v1(277.876,15.748) v1(277.876,15.748)
  Bottom Layer w0.178: v1(149.479,11.684) 153.416,7.747 224.028,7.747 224.701,8.42 228.192,8.42 229.472,9.7 229.472,14.89 229.319,15.043 229.319,15.437 v1(229.256,15.5) ; v1(261.239,13.208) 265.94,8.507 268.095,8.507 268.112,8.524 268.135,8.524 268.336,8.725 268.336,8.748 271.558,11.97 271.558,12.732 275.209,16.383 276.36,16.383 276.995,15.748 v1(277.876,15.748)
y13: U1.10 | length 131.3
  Top Layer w0.178: 172.085,20.447 172.847,21.209 v1(172.847,25.527) ; 203.708,20.828 203.835,20.955 v1(203.835,21.971) ; v1(228.875,14.5) 228.875,12.041 228.979,11.937 229.359,11.937 229.485,11.811 v1(261.239,11.811) ; U1.10 277.506,15.25 277.608,15.148 277.662,15.148 277.74,15.07 277.991,15.07 v1(278.054,15.007)
  Bottom Layer w0.178: v1(172.847,25.527) 179.569,25.527 180.966,24.13 202.565,24.13 203.962,22.733 ; v1(203.835,21.971) 203.898,22.034 203.898,22.479 203.962,22.543 203.962,22.733 ; v1(228.875,14.5) 228.875,15.037 227.817,16.095 227.817,21.738 226.822,22.733 203.962,22.733 ; v1(261.239,11.811) 261.493,11.811 265.684,7.62 269.263,7.62 269.367,7.724 269.367,7.747 272.415,10.795 272.415,13.05 275.162,15.797 276.407,15.797 277.029,15.175 277.445,15.175 277.549,15.07 277.991,15.07 v1(278.054,15.007)
y14: U1.11 | length 104.8
  Top Layer w0.178: v1(183.261,8.89) 183.261,11.049 ; v1(213.868,8.89) 213.868,10.033 213.688,10.213 213.688,10.361 213.868,10.541 ; v1(228.875,9.947) 228.94,9.947 229.705,9.182 251.834,9.182 252.05,9.398 v1(261.239,9.398) ; v1(275.832,15.2) 275.895,15.137 275.895,15.017 276.162,14.75 U1.11
  Bottom Layer w0.178: v1(183.261,8.89) 192.239,8.89 192.29,8.941 202.977,8.941 203.028,8.89 220.555,8.89 220.606,8.941 227.153,8.941 227.536,9.323 228.252,9.323 v1(228.875,9.947) ; v1(261.239,9.398) 261.239,8.852 261.486,8.852 263.226,7.112 269.621,7.112 273.05,10.541 273.05,12.796 275.113,14.859 275.127,14.859 275.343,15.075 275.707,15.075 v1(275.832,15.2)
y15: U1.12 | length 94.2
  Top Layer w0.178: v1(193.421,8.344) 193.421,11.938 ; v1(220.853,8.344) 220.853,9.271 221.742,10.16 222.123,9.779 ; v1(225.298,7.823) 225.298,10.414 ; v1(227.419,7.823) 227.851,8.255 v1(261.239,8.255) ; v1(275.59,14.478) 275.679,14.478 275.907,14.25 U1.12
  Bottom Layer w0.178: v1(193.421,8.344) 193.472,8.293 220.802,8.293 v1(220.853,8.344) ; v1(225.298,7.823) 225.336,7.785 227.381,7.785 v1(227.419,7.823) ; v1(261.239,8.255) 263.017,6.477 269.621,6.477 273.715,10.571 273.715,12.922 274.725,13.932 275.24,13.932 275.339,13.834 275.486,13.834 275.59,13.938 v1(275.59,14.478)
pads on no net: J1.4 J2.2 U1.23 U1.24 U1.25 U1.26 U1.27 U1.28 U1.29 U1.30 U1.31 U1.32 U1.35 U1.36 U1.37 U1.38 U1.39 U1.40 U1.41 U1.42 U1.43 U1.44 U1.49 U1.50 U1.51 U1.53 U1.59 U1.60 U3.1 U3.5 U3.6 U3.7 U3.8

## Polygon pours and split planes (outlines as drawn)
GND on Top Layer "GND_L01_P000" (solid, pour order 0): 0.381,31.369 0.381,0.381 304.292,0.381 304.292,31.243

## Other copper
Top Layer:
  rectangle net y6: 74.295,15.367 83.185,28.067
  rectangle net y1: 20.955,15.367 29.845,28.067
  rectangle net y3: 38.735,15.367 47.625,28.067
  rectangle net y10: 109.855,15.367 118.745,28.067
  rectangle net y8: 92.075,15.367 100.965,28.067
  pour cut-out: 228.6,31.115 228.6,1.016 261.747,1.016 261.747,31.115
  pour cut-out: 167.767,22.733 167.767,9.017 227.457,9.017 227.457,22.86
  pour cut-out: 8.128,28.711 8.128,3.302 149.225,3.302 149.225,28.459
  region net y0: 18.415,12.827 24.13,12.827 24.13,4 8.89,4 8.89,28.067 18.415,28.067
  region net y4: 59.69,4.064 44.45,4.064 44.45,12.954 50.038,12.954 50.038,28.067 59.69,28.067
  region net y5: 71.247,12.827 77.47,12.827 77.47,4 62.23,4 62.23,28.067 71.247,28.067
  region net y9: 107.442,12.863 113.017,12.863 113.017,3.973 97.777,3.973 97.777,12.863 103.378,12.863 103.378,28.103 107.442,28.103
  region net y11: 130.81,3.937 115.57,3.937 115.57,12.827 121.158,12.827 121.158,27.94 130.81,27.94
  region net y2: 36.322,12.827 41.91,12.827 41.91,3.937 26.67,3.937 26.67,12.827 32.258,12.827 32.258,28.067 36.322,28.067
  region net y12: 148.59,3.937 133.35,3.937 133.35,12.827 133.35,27.94 148.59,27.94
  region net y7: 89.662,12.827 95.25,12.827 95.25,3.937 80.01,3.937 80.01,12.827 85.598,12.827 85.598,28.067 89.662,28.067
  region net y15: 215.646,22.225 226.949,22.225 226.949,9.525 215.646,9.525 221.996,15.875
  region net y14: 220.98,15.875 214.63,9.525 205.65,9.525 205.601,9.642 211.709,15.875 205.601,22.108 205.65,22.225 214.63,22.225
  region net y13: 180.34,15.875 173.99,9.525 168.275,9.525 168.275,22.225 173.99,22.225
  region net y15: 200.66,15.875 194.31,9.525 185.33,9.525 185.166,9.525 191.389,15.875 185.166,22.225 185.33,22.225 194.31,22.225
  region net y13: 210.82,15.875 204.47,9.525 195.49,9.525 195.326,9.525 201.549,15.875 195.326,22.225 195.49,22.225 204.47,22.225
  region net y14: 190.5,15.875 184.15,9.525 175.17,9.525 175.006,9.525 181.229,15.875 175.006,22.225 175.17,22.225 184.15,22.225
Bottom Layer:
  text "fraction through the year when this was made" at 68.431,26.035 h1.52